# Altium PCB ideal V2.0.PcbDoc
Units mil, origin at the board's own origin, x right, y up, seen from the top; angles counter-clockwise.
Board outline 5354.33 x 2204.72 mil, 2 copper layers (Top Layer, Bottom Layer); 58 components, 25 nets, 117 pads, 29 vias.
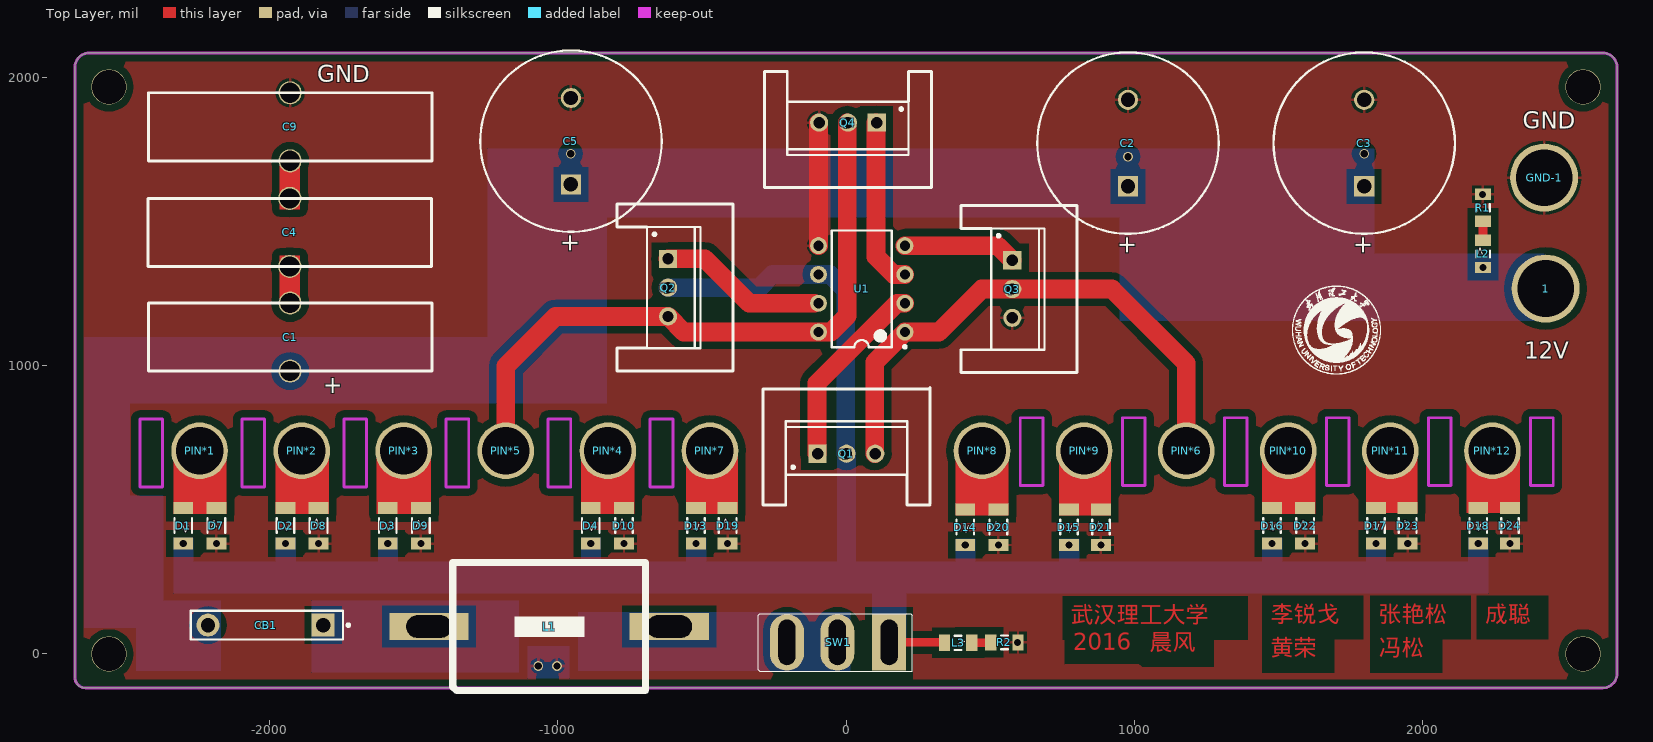
[diagram p0: Top Layer view]
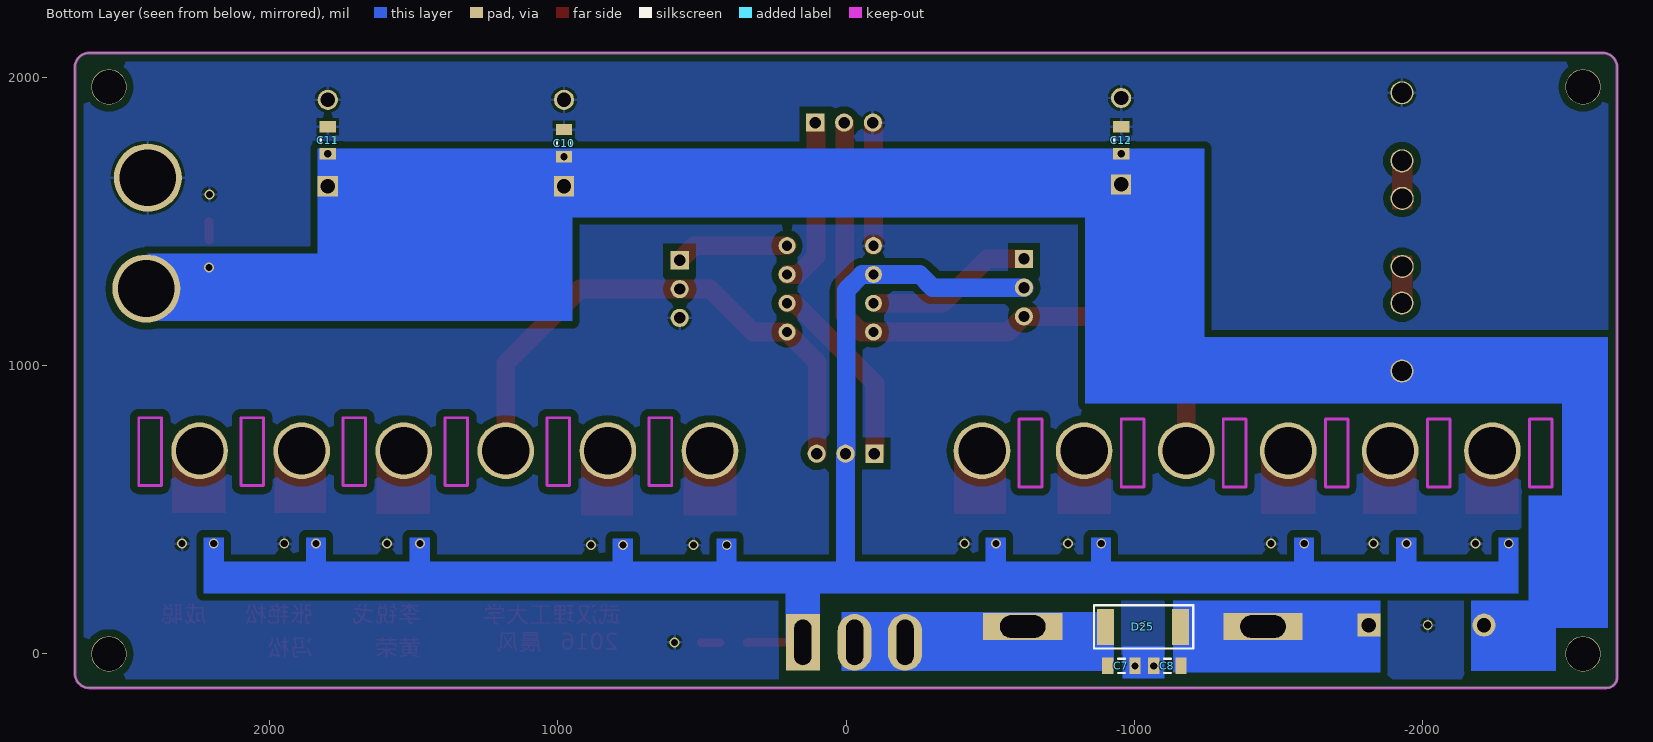
[diagram p1: Bottom Layer view, seen from below]
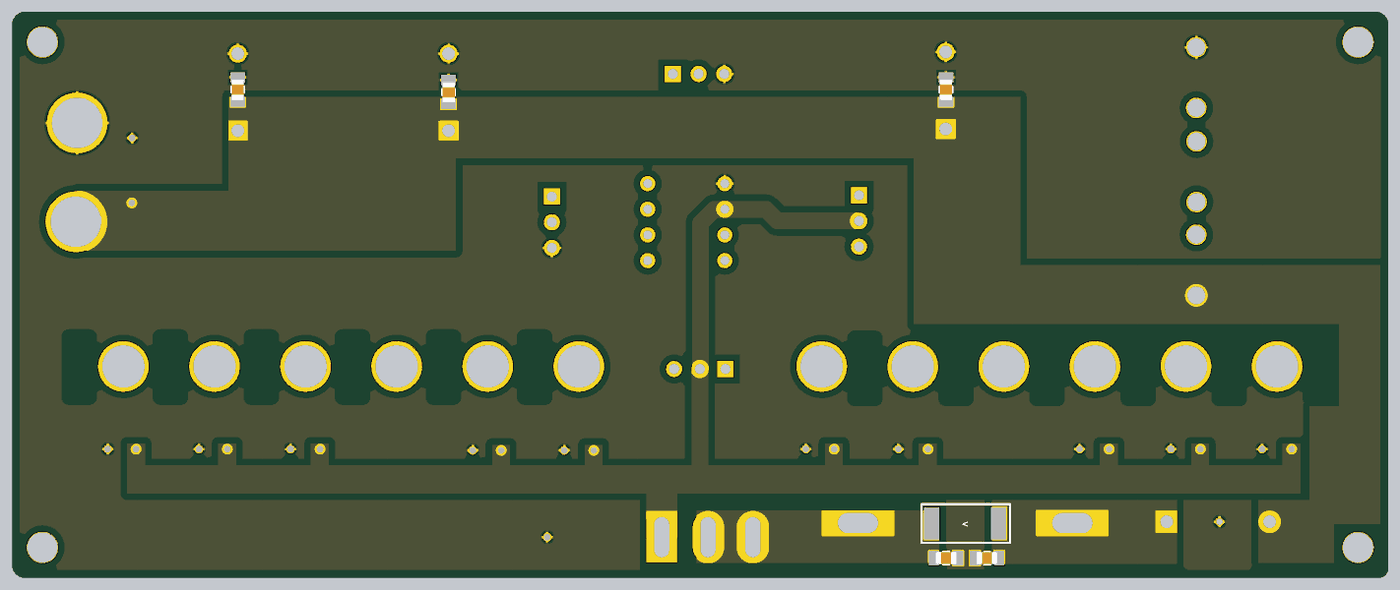
[diagram p2: 3D render of the assembled board from below, using the file's embedded part models]

## Layer stack, top to bottom
Top Layer: signal copper 1.4
Dielectric: dielectric 12.6, FR-4, Dk 4.8
Bottom Layer: signal copper 1.4

## Board outline
-2677.17,-81.22 ccw(c-2640.28,-81.22) -2640.28,-118.11 2627.17,-118.11 ccw(c2627.17,-68.11) 2677.17,-68.11 2677.17,2036.61 ccw(c2627.17,2036.61) 2627.17,2086.61 -2627.17,2086.61 ccw(c-2627.17,2036.61) -2677.17,2036.61

## Design rules (kind name [scope] priority, off if disabled: settings)
Clearance [All] p1: gap=25
PolygonConnect [All] p1: connectstyle=Relief reliefconductorwidth=10 reliefentries=4 polygonreliefangle="90 Angle" airgapwidth=10
RoutingVias [All] p1: holewidth=28 width=50 viastyle="Through Hole" minholewidth=28 minwidth=50 maxholewidth=28 maxwidth=50
SolderMaskExpansion [All] p1: expansion=4
Width [All] p1: maxlimit=100 minlimit=10 preferedwidth=50 minimp=50.000000 maximp=50.000000 favimp=50.000000
28 further rules are at their usual default settings.

## Components (designator, comment, footprint, x,y, rotation, side; value= is the part's Value field where it differs from the comment)
1 "PIN" PIN#1 2429.06,1268.5 r0 top
C1 "Cap Pol1" 法拉电容 -1930,1100 r90 top
C2 "Cap Pol1" RB7.6-15 979.06,1773.5 r270 top
C3 "Cap Pol1" RB7.6-15 1799.06,1773.5 r270 top
C4 "Cap Pol1" 法拉电容 -1930.94,1463.5 r90 top
C5 "Cap Pol1" RB7.6-15 -955,1780 r270 top
C7 "Cap Pol1" C2012 -955.94,-41.5 r180 bottom
C8 "Cap Pol1" C2012 -1115.94,-41.5 r0 bottom
C9 "Cap Pol1" 法拉电容 -1930,1830 r90 top
C10 "Cap" C2012 979.06,1773.5 r270 bottom
C11 "Cap" C2012 1799.06,1783.5 r270 bottom
C12 "Cap" C2012 -955.94,1783.5 r270 bottom
CB1 "Circuit Breaker" SPST-2 -1915,100 r180 top
D1 "S4" 1206(2) -2300.94,445 r270 top
D2 "S4" 1206(2) -1945.94,445 r270 top
D3 "S4" 1206(2) -1590.94,445 r270 top
D4 "S4" 1206(2) -885.94,445 r270 top
D7 "S4" 1206(2) -2185.94,445 r90 top
D8 "S4" 1206(2) -1830.94,445 r90 top
D9 "S4" 1206(2) -1475.94,445 r90 top
D10 "S4" 1206(2) -770.94,445 r90 top
D13 "S4" 1206(2) -520.94,445 r270 top
D14 "S4" 1206(2) 414.06,440 r270 top
D15 "S4" 1206(2) 774.06,440 r270 top
D16 "S4" 1206(2) 1479.06,445 r270 top
D17 "S4" 1206(2) 1840,445 r270 top
D18 "S4" 1206(2) 2195,445 r270 top
D19 "S4" 1206(2) -410.94,445 r90 top
D20 "S4" 1206(2) 529.06,440 r90 top
D21 "S4" 1206(2) 885,440 r90 top
D22 "S4" 1206(2) 1594.06,445 r90 top
D23 "S4" 1206(2) 1950,445 r90 top
D24 "S4" 1206(2) 2305,445 r90 top
D25 "Diode 1N4001" SK54 -1030.94,93.5 r0 bottom
GND-1 "PIN" PIN#1 2424.06,1653.5 r0 top
L1 "33uH" SMD-EC-F16 -770,95 r180 top
L2 "LED" C2012 2211.5,1389.06 r90 top
L3 "LED" C2012 389.06,38.5 r0 top
PIN*1 "PIN" PIN#2 -2244.09,705 r0 top
PIN*2 "PIN" PIN#2 -1889.76,705 r0 top
PIN*3 "PIN" PIN#2 -1535.43,705 r0 top
PIN*4 "PIN" PIN#2 -826.77,705 r0 top
PIN*5 "PIN" PIN#2 -1181.1,705 r0 top
PIN*6 "PIN" PIN#2 1181.1,705 r180 top
PIN*7 "PIN" PIN#2 -472.44,705 r0 top
PIN*8 "PIN" PIN#2 472.44,705 r0 top
PIN*9 "PIN" PIN#2 826.77,705 r0 top
PIN*10 "PIN" PIN#2 1535.43,705 r0 top
PIN*11 "PIN" PIN#2 1889.76,705 r0 top
PIN*12 "PIN" PIN#2 2244.09,705 r0 top
Q1 "MOSFET-N" mos -23.43,705.12 r90 top
Q2 "MOSFET-N" mos -607.72,1296.65 r0 top
Q3 "MOSFET-N" mos 587.28,1291.65 r0 top
Q4 "MOSFET-N" mos 31.57,1834.45 r270 top
R1 "Res" R2012 2211.5,1549.06 r90 top
R2 "Res" R2012 550,40 r0 top
SW1 "switch" SW-125V6A(-) 150,40 r180 top
U1 "LT4320-DIP" DIP-8 54.45,1267.28 r180 top

## Footprints (in the part's own frame and the unit in brackets; to place one, negate y for a bottom-side part, rotate by r counter-clockwise, add the part's x,y. Pads: shape width x height; smd on the part's side, far side on the other; paste and mask are expansions set on the pad)
1206(2) [mm]
  rect 1.05x1.75 smd: 1(-1.575,0) 2(1.575,0)
  silkscreen extent -0.65,-0.77 0.65,0.77, body extent -1.6,-0.8 1.6,0.8, height 1.6
C2012 [mm] "Chip Capacitor, 2-Leads, Body 2.0x1.2mm, IPC Low Density"
  rect 1x1.45 smd: 1(-1.2,0) 2(1.2,0)
  silkscreen extent -0.3,-0.63 0.3,0.63, body extent -0.98,-0.6 1.02,0.6, height 0.5
DIP-8 [mm] "DIP; 8 Leads; Row Spacing 7.62 mm; Pitch 2.54 mm"
  round 1.5 hole 0.9: 1(-3.81,3.81) 2(-3.81,1.27) 3(-3.81,-1.27) 4(-3.81,-3.81) 5(3.81,-3.81) 6(3.81,-1.27) 7(3.81,1.27) 8(3.81,3.81)
  silkscreen extent -3.94,-5.15 2.65,5.23, body extent -3.6,-5.15 3.6,5.15, height 5.08
mos [mm]
  rect 1.6x1.6 hole 1: 1(-0.254,1.905)
  round 1.6 hole 1: 2(-0.254,-0.635) 3(-0.254,-3.175)
  silkscreen extent -2.1,-5.99 2.6,4.72, body extent -2.15,-6.04 2.65,4.77, height 19.3
PIN#1 [mm]
  round 6 hole 5: 1(0,0)
PIN#2 [mm]
  round 5 hole 4.2: 1(0,0)
R2012 [mm] "Chip Resistor, 2-Leads, Body 2.0x1.2mm, IPC Low Density"
  rect 1x1.4 smd: 1(-1.2,0) 2(1.2,0)
  silkscreen extent -0.3,-0.6 0.3,0.6, body extent -0.98,-0.6 1.02,0.6, height 0.5
RB7.6-15 [mil] "Polarized Capacitor (Radial); 2 Leads"
  rect 70x70 hole 50: 1(150,0)
  round 70 hole 50: 2(-150,0)
  silkscreen extent -315,-315 315,315
SK54 [mm]
  rect 1.52x3.18 smd: 1(-3.305,0) 2(3.305,0)
  silkscreen extent -4.44,-1.91 4.32,1.91
SMD-EC-F16 [mm]
  rect 7x2.4 hole 2 slot 4 at 0 deg: 1(-3.973,0) 2(17.215,0)
  silkscreen extent -1.88,-5.64 15.12,5.64
SPST-2 [mil] "Switch; 2 Leads"
  rect 80x80 hole 50: 1(-100,0)
  round 80 hole 50: 2(300,0)
  silkscreen extent -192,-50 360,50
SW-125V6A(-) [mm]
  rect 3x5 hole 1.5 slot 4 at 90 deg: 0(0,0)
  oval 3x5 hole 1.5 slot 4 at 90 deg: 1(4.572,0) 2(9.017,0)
  silkscreen extent -2.03,-2.54 11.56,2.54
法拉电容 [mil]
  round 80 hole 70: 1(-118.11,0) 2(118.11,0)
  silkscreen extent -118,-492 118,492

## Part data
C1 C2 C3 C4 C5 C7 C8 C9: "Polarized Capacitor (Radial)"
C10 C11 C12: "Capacitor"
D1 D2 D3 D4 D7 D8 D9 D10 D13 D14 D15 D16 D17 D18 D19 D20 D21 D22 D23 D24: library part "Diode 1N4148", "High Conductance Fast Diode"
D25: "1 Amp General Purpose Rectifier"
L1: library part Inductor, "Inductor"
Q1 Q2 Q3 Q4: "N-Channel MOSFET"
R1 R2: "贴片电阻"
SW1: library part "small switch"

## Free pads (board coordinates)
  round 122.05 hole 118.11: 0(-2559.06,1968.5) 1(2559.06,1968.5) 2(2559.06,0) 3(-2559.06,0)

## Via types
v1: diameter 34, hole 25, Top Layer to Bottom Layer, 29 vias

## Nets (pads, with @x,y where several pads share a name; then routed paths per layer and width w, separated by ;. In a path a pad name is that pad's centre, name@x,y a point inside that pad or via, vN(x,y) a via of type N, cw(c..) or ccw(c..) an arc to the next point about the centre after c; other vN are vias at no path point)
12V: 1.1 C1.1 C2.1 C3.1 C5.1 C10.2 C11.2 C12.2 CB1.2 L2.1
  other v1: 2211.5,1341.81 979.06,1726.26 -955.94,1736.26 1799.06,1736.26
AC~1: PIN*5.1 Q2.3 Q4.2 U1.8 | length 2267.2
  Top Layer w65: PIN*5.1 -1181.1,998.9 -1008.35,1171.65 Q2.3 -563.35,1117.28 U1.8 -52.72,1117.28 4.45,1174.45 Q4.2@4.45,1844.45
AC~2: PIN*6.1 Q1.3 Q3.2 U1.1 | length 1914.8
  Top Layer w65: Q1.3@99.45,695.12 99.45,1012.28 U1.1 322.28,1117.28 471.65,1266.65 Q3.2 923.35,1266.65 1181.1,1008.9 PIN*6.1
GND: C2.2 C3.2 C5.2 C7.2 C8.2 C9.2 C10.1 C11.1 C12.1 D7.1 D8.1 D9.1 D10.1 D19.1 D20.1 D21.1 D22.1 D23.1 D24.1 GND-1.1 Q3.3 Q4.3 R1.2 R2.2 U1.5 | length 427.2
  Top Layer w65: U1.5 Q4.3@-95.55,1844.45
  other v1: -1068.7,-41.5 -1003.19,-41.5 595,40 -2020,100 529.06,377.99 885,377.99 -2185.94,382.99 -1830.94,382.99 -1475.94,382.99 -770.94,382.99 -410.94,382.99 1594.06,382.99 1950,382.99 2305,382.99 2210,1595
NetC1_2: C1.2 C4.1
NetC4_2: C4.2 C9.1
NetC7_1: C7.1 D25.2 L1.1 SW1.1 SW1.2
NetC8_1: C8.1 CB1.1 D25.1 L1.2 | length 135.9
  Bottom Layer w30: C8.1 -1163.19,91.38 D25.1
NetD1_1: D1.1 D7.2 PIN*1.1
NetD2_1: D2.1 D8.2 PIN*2.1
NetD3_1: D3.1 D9.2 PIN*3.1
NetD4_1: D4.1 D10.2 PIN*4.1
NetD13_1: D13.1 D19.2 PIN*7.1
NetD14_1: D14.1 D20.2 PIN*8.1
NetD15_1: D15.1 D21.2 PIN*9.1
NetD16_1: D16.1 D22.2 PIN*10.1
NetD17_1: D17.1 D23.2 PIN*11.1
NetD18_1: D18.1 D24.2 PIN*12.1
NetL2_2: L2.2 R1.1 | length 65.5
  Top Layer w30: L2.2 R1.1
NetL3_2: L3.2 R2.1 | length 68
  Top Layer w30: L3.2 502.76,38.5 R2.1
NetQ1_1: Q1.1 U1.2 | length 664.5
  Top Layer w65: Q1.1@-100.55,695.12 -100.55,939.56 177.17,1217.28 U1.2
NetQ2_1: Q2.1 U1.7 | length 571.7
  Top Layer w65: Q2.1 -489.92,1371.65 -335.55,1217.28 U1.7@-110,1217.28
NetQ3_1: Q3.1 U1.4 | length 393.8
  Top Layer w65: U1.4 526.65,1417.28 Q3.1
NetQ4_1: Q4.1 U1.3 | length 591.1
  Top Layer w65: Q4.1@104.45,1844.45 104.45,1378.78 165.94,1317.28 U1.3
VCC: D1.2 D2.2 D3.2 D4.2 D13.2 D14.2 D15.2 D16.2 D17.2 D18.2 L3.1 Q1.2 Q2.2 SW1.0 U1.6 | length 1832.9
  Top Layer w30: SW1.0 341.81,40 L3.1
  Bottom Layer w65: Q2.2 -301.18,1271.65 -255.55,1317.28 U1.6 -55.55,1317.28 -0.55,1262.28 Q1.2@-0.55,695.12 ; 1.57,281.57 Q1.2
  other v1: 414.06,377.99 774.06,377.99 -2300.94,382.99 -1945.94,382.99 -1590.94,382.99 -885.94,382.99 -520.94,382.99 1479.06,382.99 1840,382.99 2195,382.99

## Polygon pours and split planes (outlines as drawn)
GND on Bottom Layer "Top Layer-GND" (solid, remove dead copper, pour order 4): -2415,2086.61 -2677.17,2086.61 -2677.17,2015 -2677.17,-118.11 -1645,-118.11 2677.17,-118.11 2677.17,1150 2677.17,2086.61 1885,2086.61
GND on Top Layer "Top Layer-GND" (solid, remove dead copper, pour order 6): -2245,2086.61 -2677.17,2086.61 -2677.17,1825 -2677.17,-118.11 -1610,-118.11 2677.17,-118.11 2677.17,375 2677.17,2086.61 1655,2086.61

## Keep-outs
Keep-Out Layer:
  lines w10: -2677.17,-81.22 ccw(c-2640.28,-81.22) -2640.28,-118.11 -2559.06,-118.11 2559.06,-118.11 2627.17,-118.11 ccw(c2627.17,-68.11) 2677.17,-68.11 2677.17,-51.22 2677.17,2036.61 ccw(c2627.17,2036.61) 2627.17,2086.61 -2559.06,2086.61 -2627.17,2086.61 ccw(c-2627.17,2036.61) -2677.17,2036.61 -2677.17,2009.45 -2677.17,-81.22 ; -2451.65,580 -2372.91,580 -2372.91,815 -2451.65,815 -2451.65,580 ; -2097.32,580 -2018.58,580 -2018.58,815 -2097.32,815 -2097.32,580 ; -1742.99,580 -1664.25,580 -1664.25,815 -1742.99,815 -1742.99,580 ; -1388.66,580 -1309.92,580 -1309.92,815 -1388.66,815 -1388.66,580 ; -1034.33,580 -955.59,580 -955.59,815 -1034.33,815 -1034.33,580 ; -680,580 -680,815 -601.26,815 -601.26,580 -680,580 ; 605,585 605,820 683.74,820 683.74,585 605,585 ; 959.33,585 1038.07,585 1038.07,820 959.33,820 959.33,585 ; 1313.66,585 1392.4,585 1392.4,820 1313.66,820 1313.66,585 ; 1667.99,585 1746.73,585 1746.73,820 1667.99,820 1667.99,585 ; 2022.32,585 2101.06,585 2101.06,820 2022.32,820 2022.32,585 ; 2376.65,585 2455.39,585 2455.39,820 2376.65,820 2376.65,585

## Other copper
Top Layer:
  rectangle net NetC1_2: -1965.94,1208.5 -1895,1383.5
  rectangle net NetC4_2: -1965.94,1543.5 -1895,1723.5
  rectangle net NetD18_1: 2155,490 2340,710
  rectangle net NetD17_1: 1805,490 1985,720
  rectangle net NetD16_1: 1445,485 1630,695
  rectangle net NetD15_1: 740,480 920,700
  rectangle net NetD14_1: 380,480 565,700
  rectangle net NetD13_1: -555,485 -375,715
  rectangle net NetD4_1: -920,485 -735,705
  rectangle net NetD3_1: -1630,485 -1440,700
  rectangle net NetD2_1: -1980,485 -1795,690
  rectangle net NetD1_1: -2335,485 -2150,705
  text "李锐戈" at 1475,90 h100
  text "张艳松" at 1850,90 h100
  text "成聪" at 2220,90 h100
  text "武汉理工大学" at 779.45,88.5 h100
  text "2016" at 789.45,-6.5 h100 r0.25
  text "晨风" at 1054.45,-6.5 h100
  text "黄荣" at 1475,-25 h100
  text "冯松" at 1850,-25 h100
Bottom Layer:
  rectangle net NetC7_1: -930,-60 15,145
  rectangle net VCC: 90,35 210,260
  rectangle net GND: -1105,-85 -960,27.85
  rectangle net 12V: -2645,870 -830,1100
  rectangle net 12V: -2645,425 -2485,1060
  rectangle net 12V: -2645,90 -2370,550
  rectangle net 12V: -2465,-60 -2170,185
  rectangle net VCC: -2335,210 2230,320
  rectangle net VCC: -2335,290 -2265,405
  rectangle net VCC: -1980,290 -1910,405
  rectangle net VCC: -1625,270 -1555,405
  rectangle net NetC8_1: -1855,-65 -1135,185
  rectangle net VCC: -555,290 -485,405
  rectangle net VCC: -920,290 -850,405
  rectangle net VCC: 380,280 450,400
  rectangle net VCC: 740,270 810,400
  rectangle net VCC: 1445,285 1515,405
  rectangle net VCC: 1805,255 1875,405
  rectangle net VCC: 2160,265 2230,405
  rectangle net 12V: -1245,955 -830,1755
  rectangle net 12V: -1010,1515 1835,1755
  rectangle net 12V: 950,1175 1835,1745
  rectangle net 12V: 950,1155 2425,1390

## Silkscreen, mask and mechanical layers (free items; w line width, h text height)
Top Overlay:
  drawing of 2377 lines, arcs and shapes, not listed
  text "GND" at -1835,1965 h100
  text "GND" at 2350,1805 h100
  text ">" at 2225,1380 h50 r90
  text "12V" at 2355,1005 h100
  text "+" at -1815,885 h100
  text ">" at -1965,455 h50 r270
  text ">" at -1610,455 h50 r270
  text ">" at -905,455 h50 r270
  text ">" at -540,455 h50 r270
  text ">" at 1460,455 h50 r270
  text ">" at 1820,455 h50 r270
  text ">" at 2175,455 h50 r270
  text ">" at -2315,450 h50 r270
  text ">" at 395,450 h50 r270
  text ">" at 755,450 h50 r270
  text ">" at -1815,440 h50 r90
  text ">" at -755,440 h50 r90
  text ">" at -395,440 h50 r90
  text ">" at -2170,435 h50 r90
  text ">" at -1460,435 h50 r90
  text ">" at 1610,435 h50 r90
  text ">" at 1965,435 h50 r90
  text ">" at 2320,435 h50 r90
  text ">" at 545,430 h50 r90
  text ">" at 900,430 h50 r90
  text ">" at 385,20 h50
Bottom Overlay:
  text ">" at -1045,80 h50
Mechanical 15:
  lines w10: -2559.06,0 2559.06,0 ; -4030,-1955 -2061.5,-1955 -2061.5,-1750 -4030,-1750 -4030,-1955 ; -1864.65,-1955 103.86,-1955 103.86,-1750 -1864.65,-1750 -1864.65,-1955

## Text inside footprints (layer, text, board x,y; h text height)
C2: Top Overlay "+" at 950.05,1453.35 h59.06 r270
C3: Top Overlay "+" at 1770.05,1453.35 h59.06 r270
C5: Top Overlay "+" at -984.01,1459.85 h59.06 r270